# Altium PCB IV18InCaseCover.PcbDoc
Units mil, origin at the board's own origin, x right, y up, seen from the top; angles counter-clockwise.
Board outline 3317.12 x 2923.72 mil, 2 copper layers (Top Layer, Bottom Layer); 3 components, 62 nets, 3 pads, 0 vias.
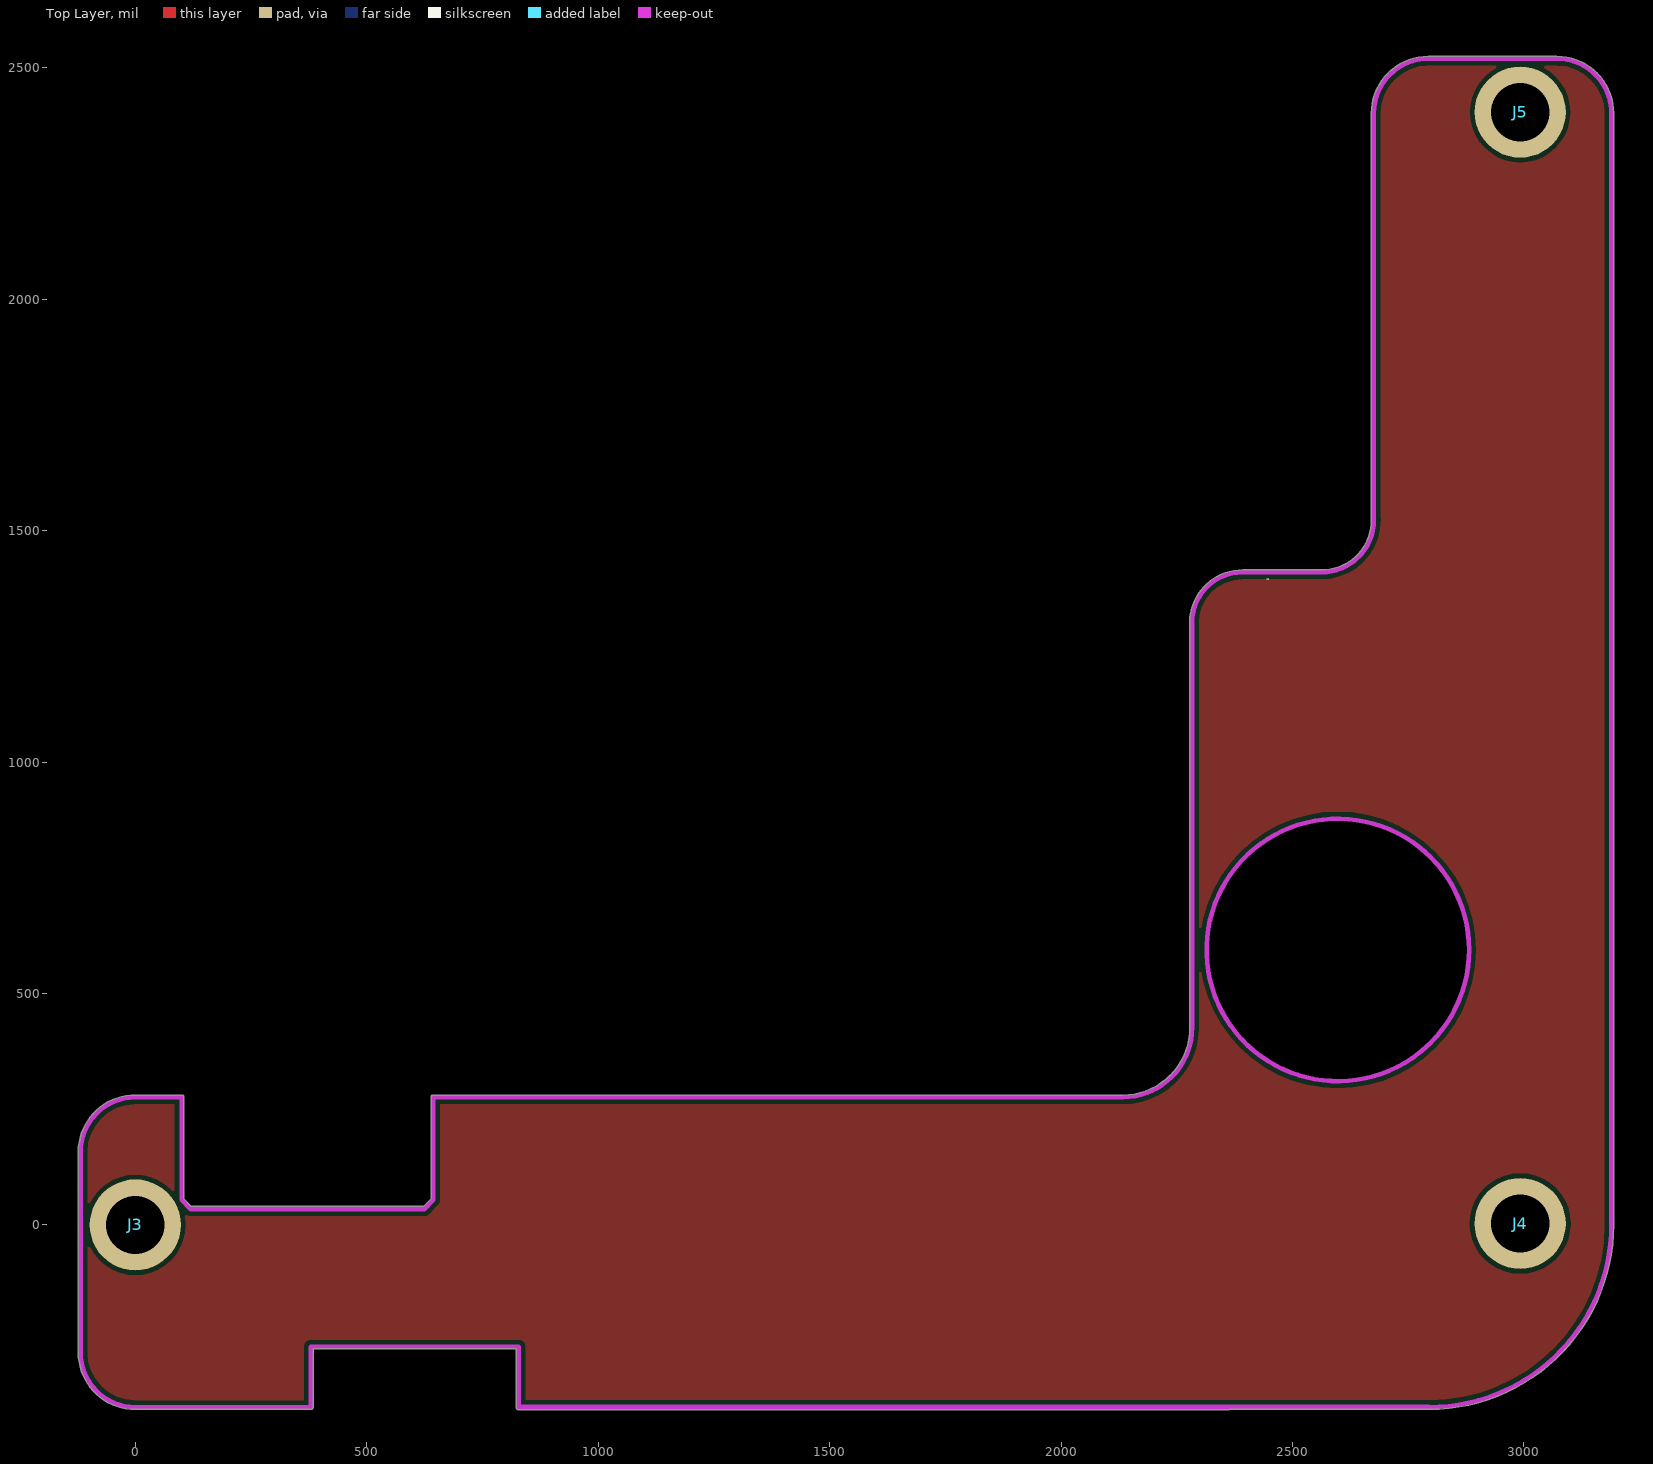
[diagram p0: Top Layer view]
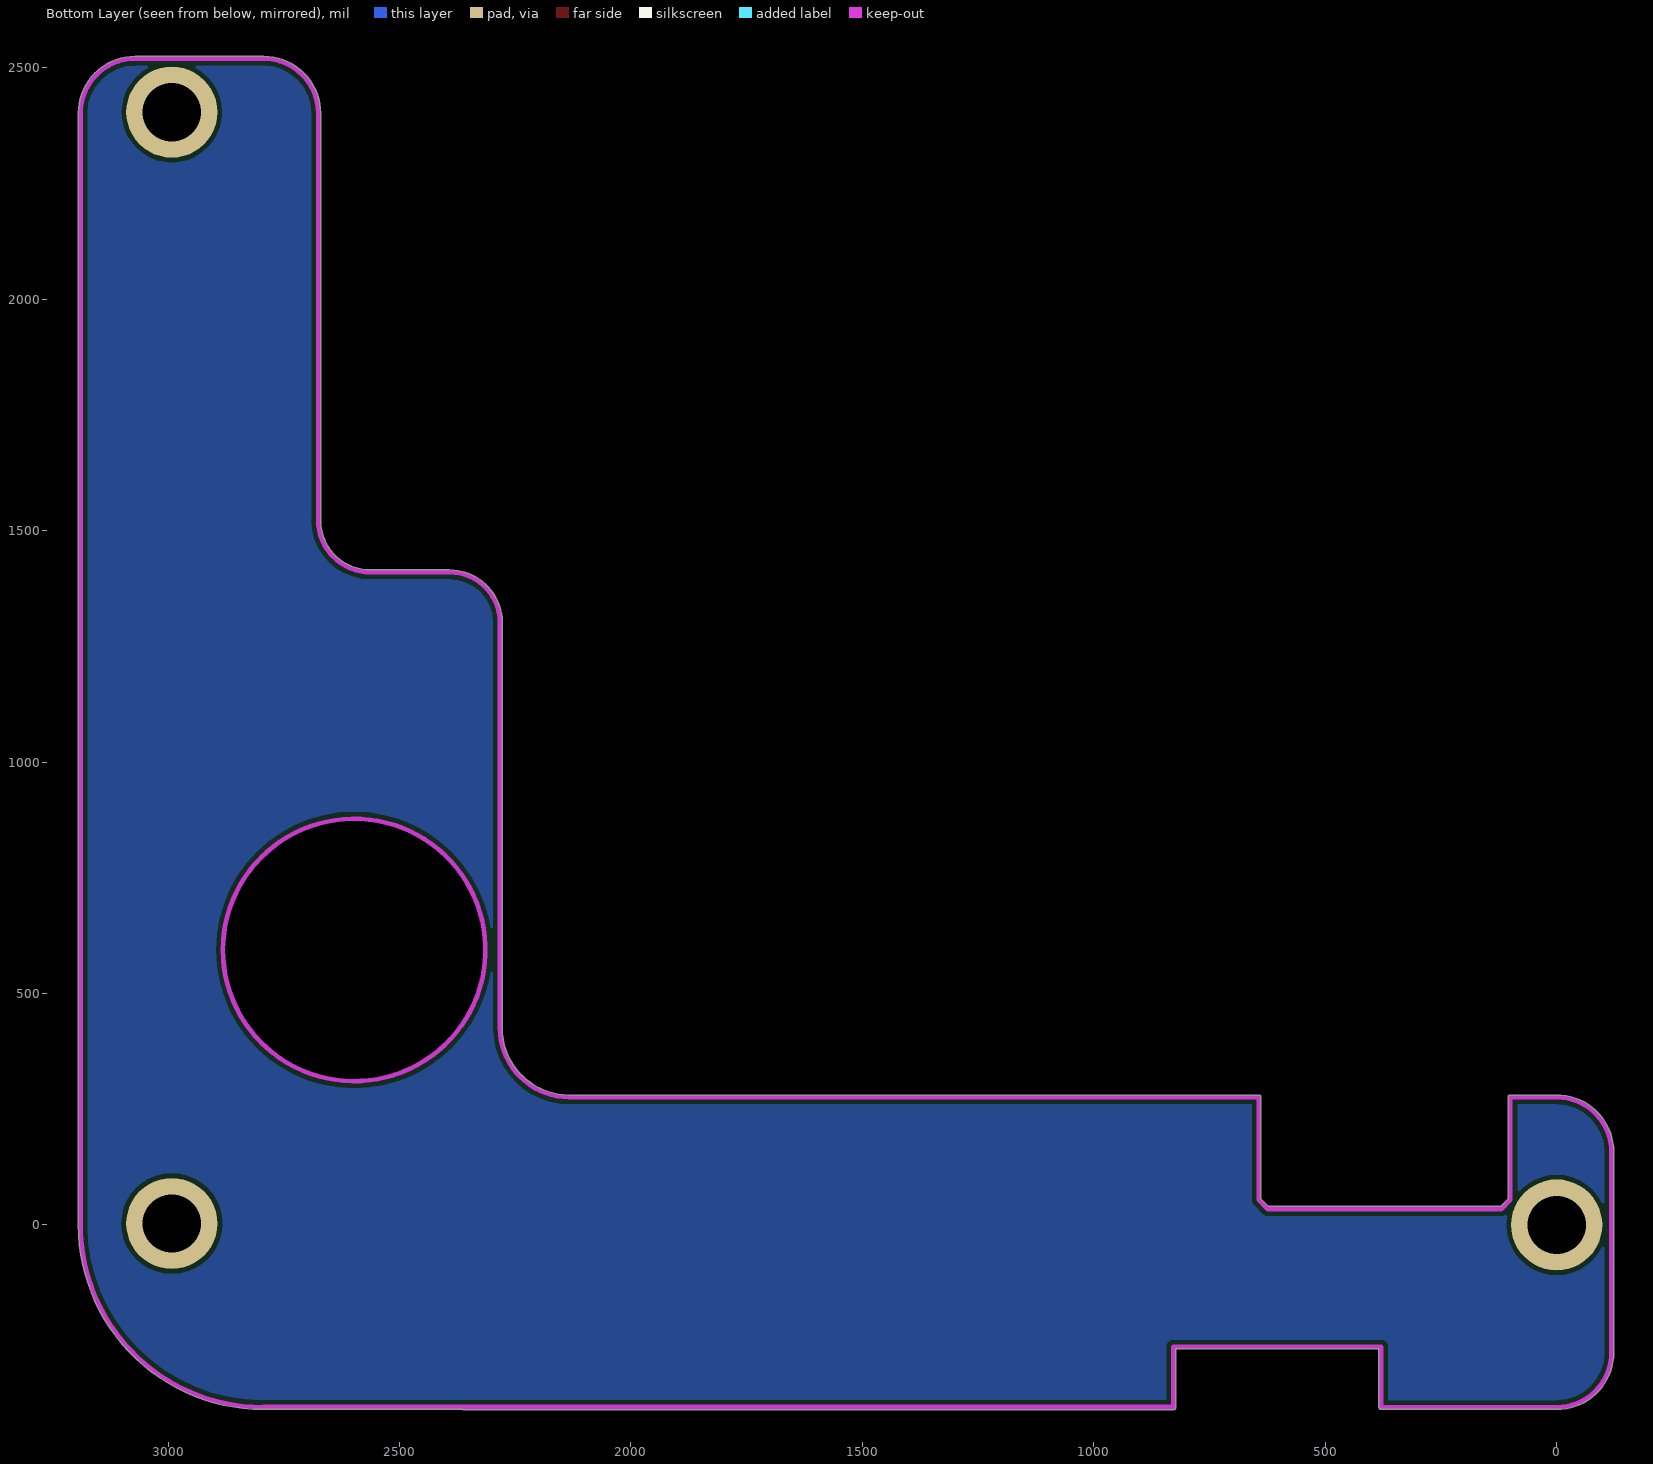
[diagram p1: Bottom Layer view, seen from below]

## Layer stack, top to bottom
Top Solder: solder mask 0.4, Solder Resist, Dk 3.5
Top Layer: signal copper 1.4
Dielectric 1: dielectric 12.6, FR-4, Dk 4.8
Bottom Layer: signal copper 1.4
Bottom Solder: solder mask 0.4, Solder Resist, Dk 3.5

## Board outline
-123.13,-275.59 ccw(c0,-275.59) 0,-398.72 379,-398.72 ccw(c379,-393.7) 384.01,-393.7 384.01,-268.02 822.99,-268.02 822.99,-394 ccw(c828,-394) 828,-399.02 2361.91,-399.02 ccw(c2361.91,-394) 2363.61,-398.72 2795.28,-398.72 ccw(c2795.28,-393.7) 2795.29,-398.72 ccw(c2794.51,0.77) 3193.99,-0.01 ccw(c3188.98,0) 3193.99,0 ccw(c3188.98,0) 3193.99,0.03 3193.99,626.6 3193.99,2401.47 ccw(c3188.98,2401.57) 3193.99,2401.57 ccw(c3070.87,2401.57) 3070.87,2524.7 ccw(c3070.87,2519.69) 3070.82,2524.7 2795.28,2524.7 ccw(c2795.28,2519.69) 2794.51,2524.64 ccw(c2793.74,2519.69) 2793.74,2524.7 ccw(c2793.74,2401.57) 2670.61,2401.66 ccw(c2793.74,2401.57) 2670.61,2401.57 cw(c2675.63,2401.57) 2670.61,2401.66 2670.61,2401.57 2670.61,1522.5 cw(c2563.13,1522.5) 2563.13,1415.01 2392.13,1415.01 2392.13,1415.02 cw(c2392.13,1410) 2392.16,1415.01 2392.13,1415.02 ccw(c2392.13,1301) 2278.11,1301 2278.11,758.84 ccw(c2283.13,758.84) 2278.48,756.95 2278.42,425.71 ccw(c2283.43,425.71) 2278.42,425.66 ccw(c2133.29,425.73) 2278.42,425.71 2278.42,425.66 cw(c2133.29,425.73) 2133.29,280.61 cw(c2133.29,425.73) 2133.26,280.61 ccw(c2133.26,275.59) 2133.26,280.61 644,280.61 ccw(c644,275.59) 638.99,275.59 638.99,56.08 622.92,40.02 121.08,40.02 105.01,56.08 105.01,275.59 ccw(c100,275.59) 100,280.61 0,280.61 ccw(c0,157.48) -123.13,157.48
cut-out: 2314.49,594 ccw(c2598,594) 2598,310.49 ccw(c2598,594) 2881.51,594 ccw(c2598,594) 2598,877.51 ccw(c2598,594)

## Design rules (kind name [scope] priority, off if disabled: settings)
Clearance [All] p1: gap=10 ignorepadtopadclearanceinfootprint=FALSE except(0: Arc-Hole Track-Hole SMDPad-Hole THPad-Hole Via-Hole Fill-Hole Poly-Hole Region-Hole Text-Hole)
PolygonConnect [All] p1: connectstyle=Relief reliefconductorwidth=10 reliefentries=4 polygonreliefangle="90 Angle" airgapwidth=10
RoutingVias [All] p1: holewidth=28 width=50 viastyle="Through Hole" minholewidth=28 minwidth=50 maxholewidth=28 maxwidth=50
SolderMaskExpansion [All] p1: expansion=4
Width [All] p1: maxlimit=10 minlimit=10 preferedwidth=10
30 further rules are at their usual default settings.

## Components (designator, comment, footprint, x,y, rotation, side; value= is the part's Value field where it differs from the comment)
J3 "定位孔" 铜柱定位孔 0,0 r0 top
J4 "定位孔" 铜柱定位孔 2992,3 r0 top
J5 "定位孔" 铜柱定位孔 2992,2404 r0 top

## Footprints (in the part's own frame and the unit in brackets; to place one, negate y for a bottom-side part, rotate by r counter-clockwise, add the part's x,y. Pads: shape width x height; smd on the part's side, far side on the other; paste and mask are expansions set on the pad)
铜柱定位孔 [mm]
  round 5 hole 3.2: 1(0,0)

## Nets (pads, with @x,y where several pads share a name; then routed paths per layer and width w, separated by ;. In a path a pad name is that pad's centre, name@x,y a point inside that pad or via, vN(x,y) a via of type N, cw(c..) or ccw(c..) an arc to the next point about the centre after c; other vN are vias at no path point)
3V3: 
a: 
b: 
BLANKING: 
c: 
CLOCK: 
d: 
D2+: 
D2-: 
D+: 
D-: 
DIN: 
DTR: 
e: 
EN: 
f: 
g: 
G1: 
G2: 
G3: 
G4: 
G5: 
G6: 
G7: 
G8: 
G9: 
GND: 
GPIO0: 
GPIO2: 
GPIO15: 
h: 
HV_BLANKING: 
HV_CLOCK: 
HV_DIN: 
HV_STORBE: 
NetBAT1_1: 
NetC4_2: 
NetC5_2: 
NetC7_2: 
NetD1_A: 
NetK2_3: 
NetK3_1: 
NetK3_2: 
NetL1_1: 
NetQ1_G: 
NetQ2_B: 
NetQ3_B: 
NetQ4_B: 
NetR2_1: 
NetR6_2: 
NetR7_2: 
nRST: 
PWRSW1: 
PWRSW2: 
RTS: 
RXD0: 
SCL: 
SDA: 
STORBE: 
TXD0: 
VCC: 
VH: 
pads on no net: J3.1 J4.1 J5.1

## Polygon pours and split planes (outlines as drawn)
no net on Top Layer " " (solid, pour order 4): 0,275.59 ccw(c0,157.48) -118.11,157.48 -118.11,-275.59 ccw(c0,-275.59) 0,-393.7 379,-393.7 379,-263 828,-263 828,-393 828.7,-393.7 2795.28,-393.7 ccw(c2795.28,0) 3188.98,0 3188.98,2401.57 ccw(c3070.87,2401.57) 3070.87,2519.69 2795.28,2519.69 2794,2519.69 ccw(c2794,2401.57) 2675.89,2401.57 2675.89,1522.89 cw(c2563,1522.89) 2563,1410 2392,1410 ccw(c2392,1301) 2283,1301 2283,426 2283,425 cw(c2133.59,425) 2133.59,275.59 644.2,275.59 644,275.8 644,54 624,34 120,34 100,54 100,275.59
GND on Bottom Layer " " (solid, pour order 6): 100,275.59 0,275.59 ccw(c0,157.48) -118.11,157.48 -118.11,-275.59 ccw(c0,-275.59) 0,-393.7 379,-393.7 379,-267 383,-263 824,-263 828,-267 828,-393 828.7,-393.7 2795.28,-393.7 ccw(c2795.28,0) 3188.98,0 3188.98,2401.57 ccw(c3070.87,2401.57) 3070.87,2519.69 2794,2519.69 ccw(c2794,2401.57) 2675.89,2401.57 2675.89,1522.89 cw(c2563,1522.89) 2563,1410 2392,1410 ccw(c2392,1301) 2283,1301 2283,426 2283,425 cw(c2133.59,425) 2133.59,275.59 647.41,275.59 647.2,275.8 647.2,57.2 644,54 624,34 120,34 100,54

## Keep-outs
Keep-Out Layer:
  circle w10: c2598,594 r283.51
  lines w10: 2133.59,275.59 2134,276 ccw(c2133.5,425.5) 2283,426 ; 2133.8,275.8 647.2,275.8 644,275.8 644,54 ; 2794,2519.69 ccw(c2794,2401.57) 2675.89,2401.57 2675.89,1523 cw(c2562.94,1522.94) 2563,1410 ; 2795.28,2519.69 3070.87,2519.69 ; 624,34 644,54 ; 624,34 120,34 100,54 100,275.59 0,275.59 ccw(c0,157.48) -118.11,157.48 -118.11,-275.59 ccw(c0,-275.59) 0,-393.7 379,-393.7 379,-263 828,-263 828,-393 2794.57,-393 2795.28,-393.7 ccw(c2795.28,0) 3188.98,0 3188.98,2401.57 ccw(c3070.87,2401.57) 3070.87,2519.69 ; 624,34 644,54 ; 2283,426 2283,426 ; 2283,426 2283,1301 cw(c2392,1301) 2392,1410 ; 2392,1410 ccw(c2392,1410) 2392,1410 ; 2392,1410 2563,1410 ; 2392,1410 2392,1410 ; 2563,1410 ccw(c2563,1410) 2563,1410 ; 3070.87,2519.69 3070.87,2519.69

## Silkscreen, mask and mechanical layers (free items; w line width, h text height)
Top Overlay:
  lines w0.12: 2444.78,1396.28 2448.76,1396.28
Top Solder:
  drawing of 18672 lines, arcs and shapes, not listed
Mechanical 1:
  circle w10: c2598,593 r282.38
  lines w10: 2133.26,275.59 ccw(c2133.29,425.73) 2283.43,425.71 2283.5,758.47 2283.13,758.84 2283.13,1301 cw(c2392.13,1301) 2392.13,1410 2563.13,1410 ccw(c2563.13,1522.5) 2675.63,1522.5 2675.63,2401.57 ; 2133.29,275.59 1220.47,275.59 644,275.59 644,54 625,35 119,35 100,54 100,275.59 0,275.59 ccw(c0,157.48) -118.11,157.48 -118.11,-275.59 ccw(c0,-275.59) 0,-393.7 379,-393.7 379,-264 380,-263 828,-263 828,-394 2361.91,-394 2362.2,-393.7 2795.28,-393.7 ; 2675.63,2401.58 cw(c2793.74,2401.57) 2793.74,2519.69 ; 2793.74,-393.7 ccw(c2794.51,0.77) 3188.98,0 3188.98,626.6 3188.98,2401.57 ccw(c3070.87,2401.57) 3070.87,2519.69 2795.28,2519.69